# Altium PCB cree_module_v2.PcbDoc
Units mil, origin at the board's own origin, x right, y up, seen from the top; angles counter-clockwise.
Board outline 1500 x 1075 mil, 2 copper layers (Top Layer, Bottom Layer); 23 components, 17 nets, 67 pads, 9 vias.
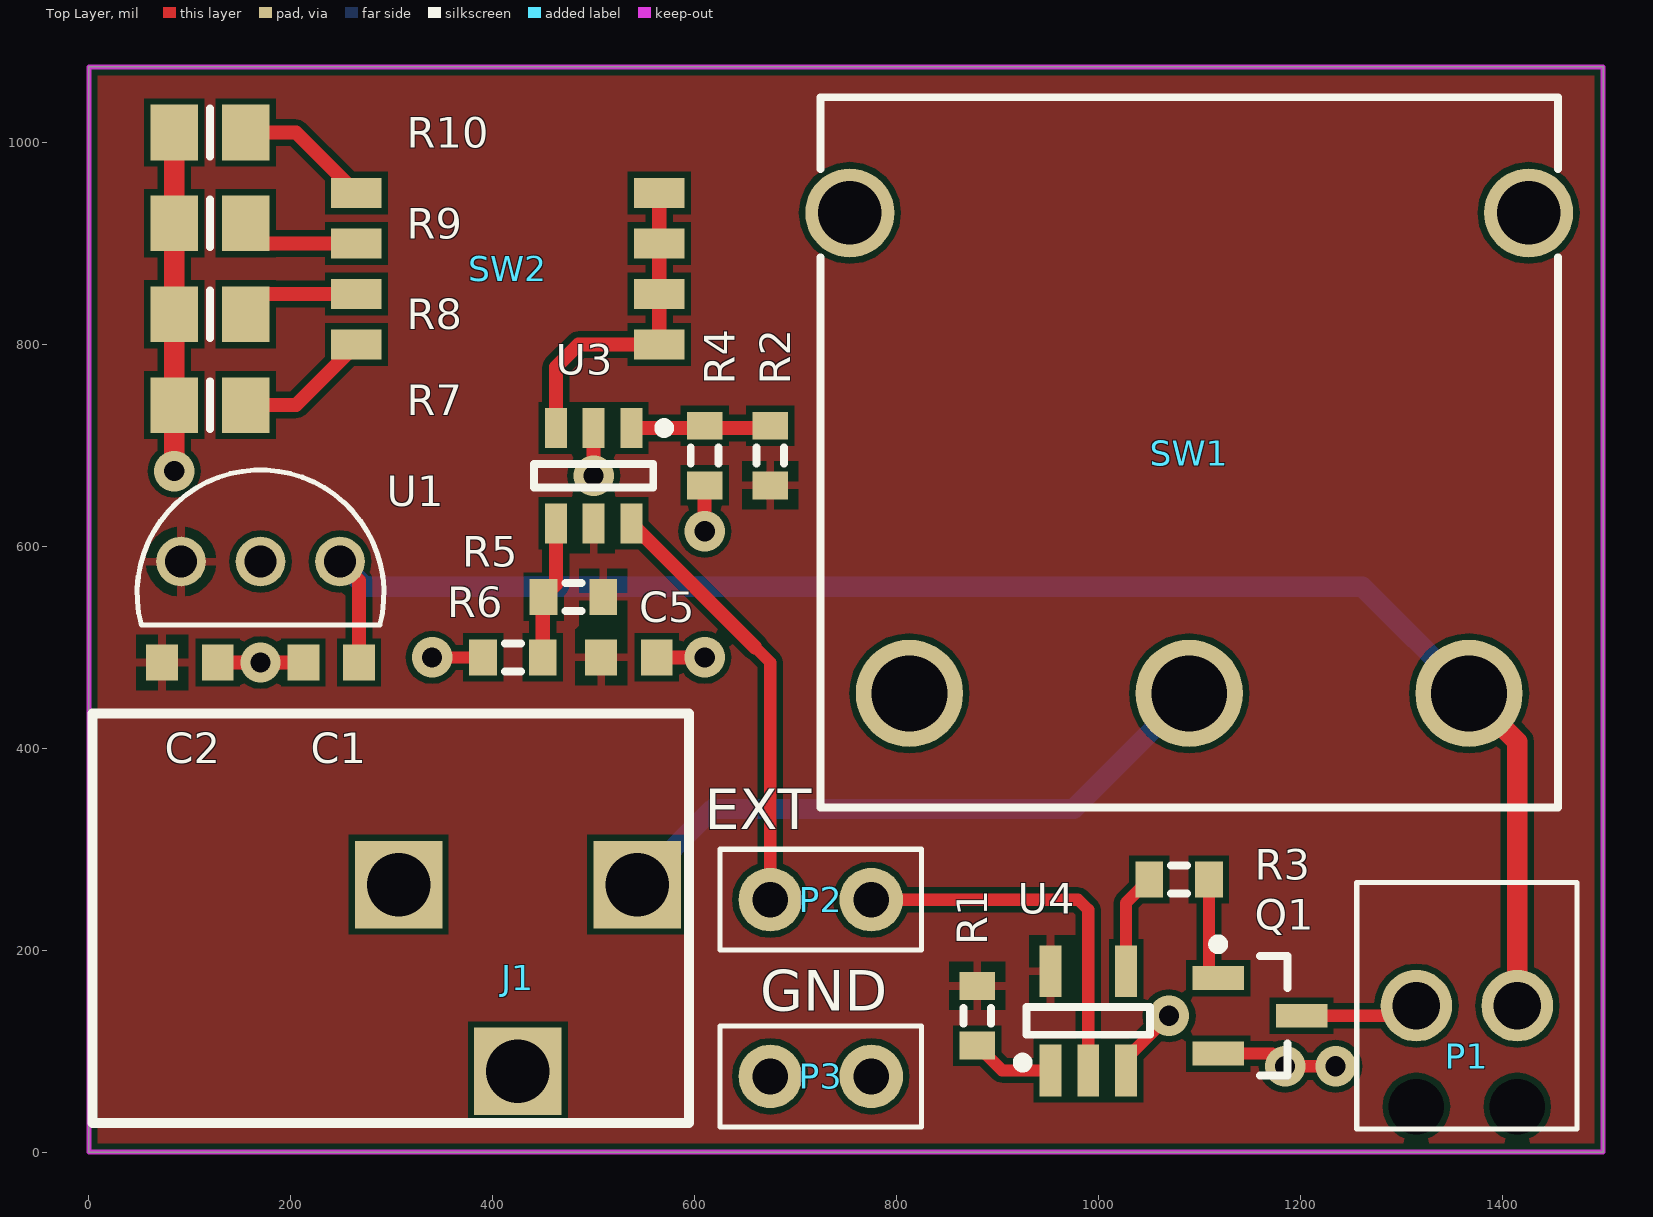
[diagram p0: Top Layer view]
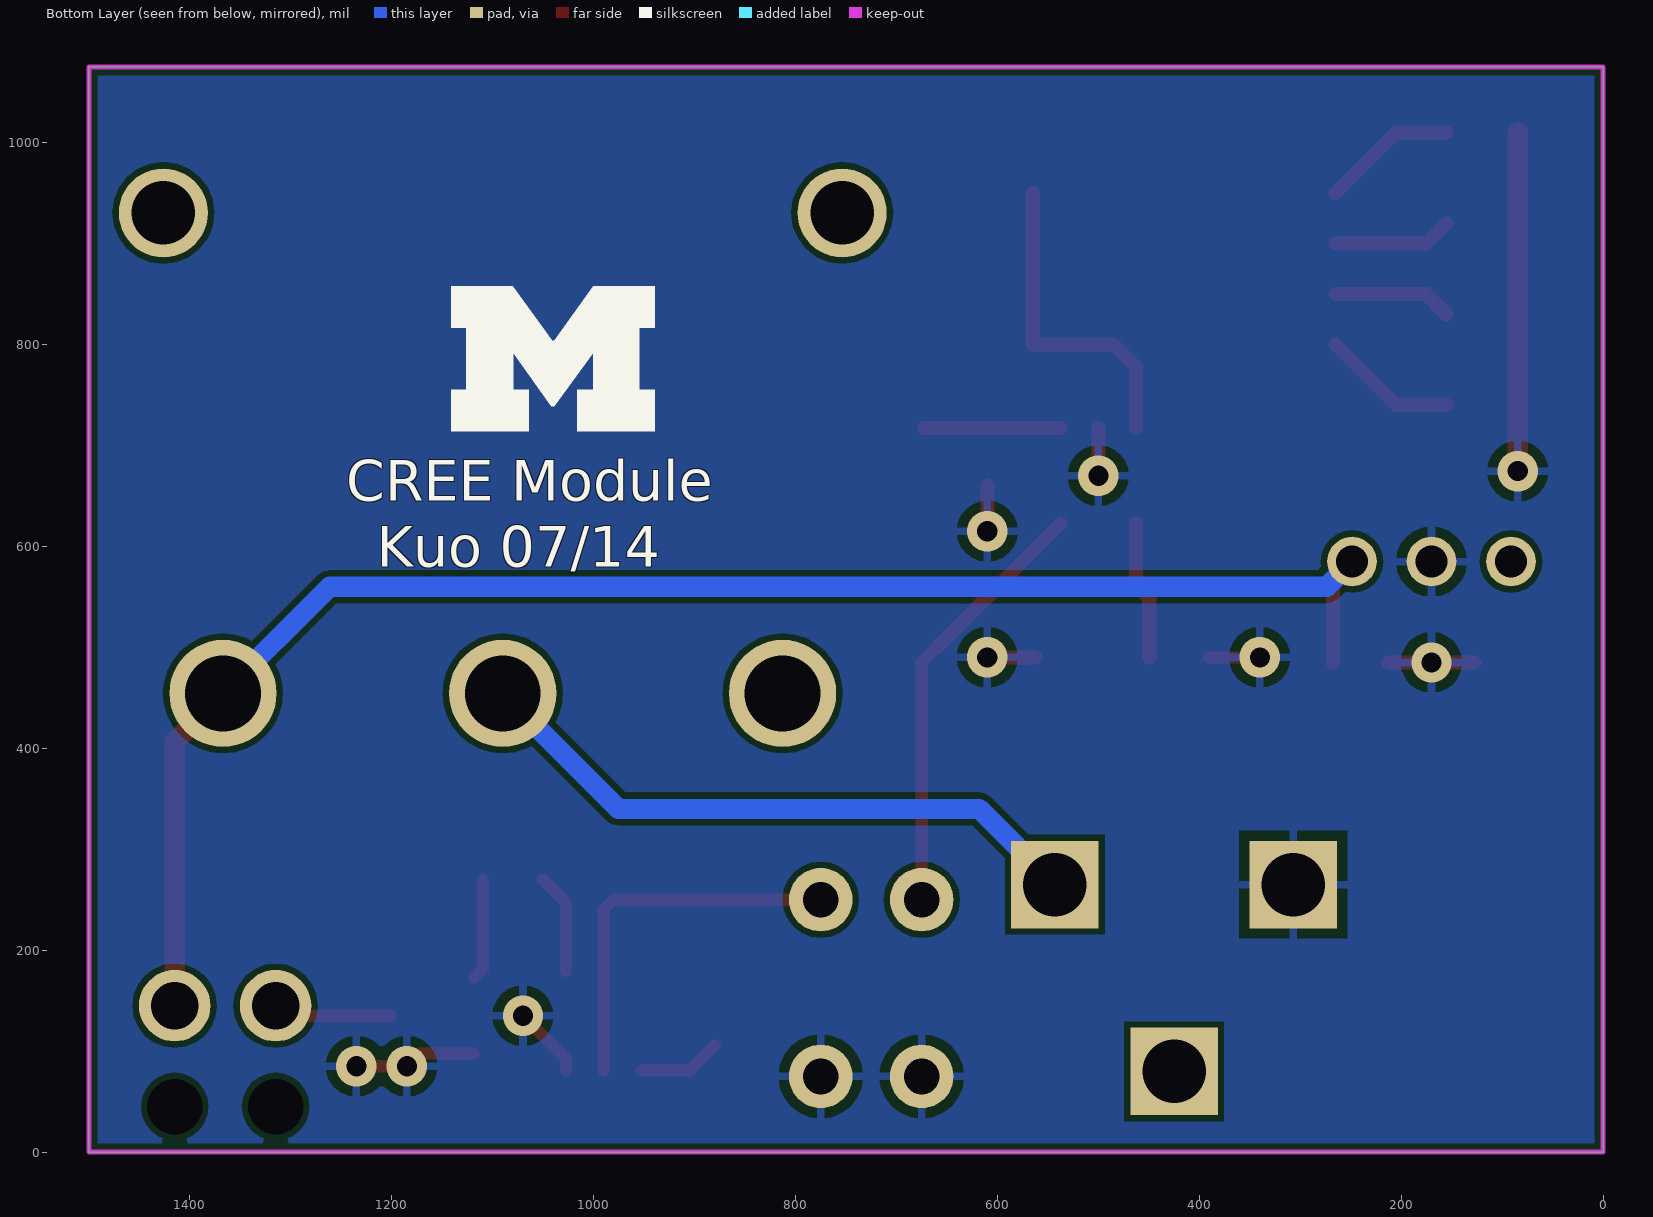
[diagram p1: Bottom Layer view, seen from below]

## Layer stack, top to bottom
Top Solder: solder mask 0.4, Solder Resist, Dk 3.5
Top Layer: signal copper 1.4
Dielectric 1: dielectric 12.6, FR-4, Dk 4.8
Bottom Layer: signal copper 1.4
Bottom Solder: solder mask 0.4, Solder Resist, Dk 3.5

## Board outline
0,0 1500,0 1500,1075 0,1075

## Design rules (kind name [scope] priority, off if disabled: settings)
Clearance "Clearance~Sunstone Circuits" [All] p1: gap=6 // Sunstone Circuits Minimum Clearance Rule (Double Sided)
HoleSize "HoleSize~Sunstone Circuits" [All] p1: absolutevalues=TRUE maxlimit=251 minlimit=16 maxpercent=80.000 minpercent=20.000 // SSC Hole Size Rule For Single Sided & Double Sided Designs.
HoleSize Testpoint [All] p2: absolutevalues=TRUE maxlimit=100 minlimit=1 maxpercent=80.000 minpercent=20.000
HoleSize TestPointUsage [All] p3: absolutevalues=TRUE maxlimit=100 minlimit=1 maxpercent=80.000 minpercent=20.000
MinimumAnnularRing "MinimumAnnularRing~Sunstone Circuits" [All] p1: minimumring=7 // Sunstone Circuits Minimum Annular Ring (Double Sided)
PlaneClearance "PlaneClearance~Sunstone Circuits" [All] p1: clearance=12 // Sunstone Circuits Power Plane Clearance Rule (Double Sided)
PlaneConnect "PlaneConnect~Sunstone Circuits" [All] p1: planeconnectstyle=Relief reliefexpansion=10 reliefentries=4 reliefconductorwidth=8 reliefairgap=10 // Sunstone Circuits Power Plane Connect Rule (Double Sided)
PolygonConnect "PolygonConnect~Sunstone Circuits" [All] p1: connectstyle=Relief reliefconductorwidth=8 reliefentries=4 polygonreliefangle="90 Angle" airgapwidth=10 // Sunstone Circuits Polygon Connect Style (Double Sided)
RoomDefinition cree_module [InComponentClass('cree_module')] p1: confinementstyle=ConfineIn formatcopy=TRUE lockcomponents=FALSE outline -13.65,13.78 -13.65,449.29 35.26,449.29 35.26,688.24 39.13,688.24 39.13,1059.37 200.87,1059.37 200.87,1058.86 1483.32,1058.86 1483.32,279.55 1486.56,279.55 1486.56,7.44 1243.44,7.44 1243.44,12.5 622.5,12.5 622.5,13.78
RoutingVias "RoutingVias~Sunstone Circuits" [All] p1: holewidth=16 width=30 viastyle="Through Hole" minholewidth=16 minwidth=30 maxholewidth=20 maxwidth=40 // Sunstone Circuits Routing Vias Rule (Double Sided)
ShortCircuit "ShortCircuit~Sunstone Circuits" [All] p1: allowed=FALSE // Sunstone Circuits Short Circuit Rule~Do Not Allow (Double Sided)
SolderMaskExpansion "Tent Vias" [isvia] p1: expansion=-15 // Sunstone Circuits Solder Mask Expansion Rule (Double Sided)
SolderMaskExpansion "SolderMaskExpansion~Sunstone Circuits" [All] p2: expansion=3 // Sunstone Circuits Solder Mask Expansion Rule (Double Sided)
ViasUnderSMD "ViasUnderSMD~Sunstone Circuits" [All] p1: allowed=FALSE // Sunstone Circuits Vias Under SMD~Do Not Allow (Double Sided)
Width "Width~Sunstone Circuits" [All] p1: maxlimit=100 minlimit=6 preferedwidth=10 // Sunstone Circuits Minimum Width Rule (Double Sided)
25 further rules are at their usual default settings.

## Components (designator, comment, footprint, x,y, rotation, side; value= is the part's Value field where it differs from the comment)
C1 "Cap Semi" 1608[0603] 240,485 r0 top
C2 "Cap Semi" 1608[0603] 100,485 r180 top
C5 "Cap Semi" 1608[0603] 535,490 r180 top
J1 "PJ-102AH" PJ-102AH 425,265 r90 top
P1 "Screw connector" MPT_2position 1365,145 r0 top
P2 "1 x 2 header" "1x2 header" 725,250 r0 top
P3 "1 x 2 header" "1x2 header" 725,75 r180 top
Q1 "Si2312CDS" SOT95P250-3N 1160,135 r0 top
R1 "Res3" J1-0603 880,135 r90 top
R2 "Res3" J1-0603 675,690 r270 top
R3 "Res3" J1-0603 1080,270 r180 top
R4 "Res3" J1-0603 610,690 r90 top
R5 "Res3" J1-0603 480,550 r0 top
R6 "Res3" J1-0603 420,490 r0 top
R7 "Res3" 6-0805_N 120,740 r0 top
R8 "Res3" 6-0805_N 120,830 r0 top
R9 "Res3" 6-0805_N 120,920 r0 top
R10 "Res3" 6-0805_N 120,1010 r0 top
SW1 "D502J12S2AHQF" "Rocker switch" 1090,415 r270 top
SW2 "CHS-04TB" CHS04TB 415,875 r90 top
U1 "LM78L05" TO92 170,585 r0 top
U3 "LTC6992" TSOT23-6 500,670 r270 top
U4 "SN74LVC1G126" SOT23-5 990,130 r90 top

## Footprints (in the part's own frame and the unit in brackets; to place one, negate y for a bottom-side part, rotate by r counter-clockwise, add the part's x,y. Pads: shape width x height; smd on the part's side, far side on the other; paste and mask are expansions set on the pad)
"1x2 header" [mm] "1x2 header, 100 mils"
  round 1.6 hole 0.9: 1(-1.27,0) 2(1.27,0)
  silkscreen extent -2.54,-1.27 2.54,1.27, body extent -2.53,-1.26 2.53,1.26, height 8.38
6-0805_N [mm] "Chip Resistor, Body 2.0x1.2mm, IPC Medium Density"
  rect 1.2x1.4 smd: 1(-0.9,0) 2(0.9,0)
  silkscreen extent 0,-0.6 0,0.6, body extent -1.07,-0.7 1.07,0.7, height 0.7
1608[0603] [mm] "Chip Capacitor, Body 1.6x0.8mm, IPC High Density"
  rect 0.8x0.9 smd: 1(-0.7,0) 2(0.7,0)
  body extent -0.87,-0.48 0.87,0.48, height 1.3
CHS04TB [mm] "4 POS DIP SWITCH"
  rect 0.76x1.27 smd: 1(-1.905,-3.81) 2(-1.905,3.81) 3(-0.635,-3.81) 4(-0.635,3.81) 5(0.635,-3.81) 6(0.635,3.81) 7(1.905,-3.81) 8(1.905,3.81)
J1-0603 [mm] "Chip Resistor, Body 1.6x0.8mm, IPC High Density"
  rect 0.7x0.9 smd: 1(-0.75,0) 2(0.75,0)
  silkscreen extent -0.2,-0.35 0.2,0.35, body extent -0.85,-0.48 0.85,0.48, height 0.9
MPT_2position [mm] "Screw connector 2 pos"
  round 1.8 hole 1.2: 1(-1.27,0) 2(1.27,0)
  round 0 hole 1.4: ""(-1.27,-2.54) ""(1.27,-2.54)
  silkscreen extent -2.77,-3.1 2.77,3.1
PJ-102AH [mm] "Power Jack"
  rect 2.2x2.2 hole 1.6: 1(0,-3) 2(0,3) 3(-4.7,0)
  silkscreen extent -6,-4.3 4.3,10.7, body extent -5.75,-3.99 4.08,10.89, height 10
"Rocker switch" [mm] "PCB through hole right angle"
  round 2.7 hole 1.91: 1(-1,0) 1A(-1,7.04) 1B(-1,-7.04)
  round 2.24 hole 1.6: ""(-13.09,8.54) ""(-13.09,-8.54)
  silkscreen extent -16,-9.28 1.88,9.28
SOT23-5 [mm] "SOT23, 5-Leads, Body 2.9x1.6mm, Pitch 0.95mm, Lead Span 2.8mm, IPC High Density"
  rect 1.3x0.55 smd: 1(-1.25,0.95) 2(-1.25,0) 3(-1.25,-0.95) 4(1.25,-0.95) 5(1.25,0.95)
  silkscreen extent -1.17,-1.55 0.35,1.77, body extent -0.67,-1.5 0.65,1.5, height 1.45
SOT95P250-3N [mm] "SOT23, 3-Leads, Body 2.9x1.3mm, Pitch 0.95mm, Lead Span 2.3mm, IPC Medium Density"
  rect 1.3x0.6 smd: 1(-1.05,0.95) 2(-1.05,-0.95) 3(1.05,0)
  silkscreen extent -1.17,-1.5 0.7,1.92, body extent -0.7,-1.5 0.7,1.5, height 1.2
TO92 [mm]
  round 1.25 hole 0.8: 1(-2,0) 2(0,0) 3(2,0)
  silkscreen extent -3.1,-1.6 3.1,2.3
TSOT23-6 [mm] "SOT23, 6-Leads, Body 3.0x2.9mm (max), Pitch 0.95mm, IPC Medium Density"
  rect 1x0.55 smd: 1(-1.2,0.95) 2(-1.2,0) 3(-1.2,-0.95) 4(1.2,-0.95) 5(1.2,0) 6(1.2,0.95)
  silkscreen extent -1.32,-1.5 0.3,1.9, body extent -0.87,-1.5 0.87,1.5, height 1

## Part data
C1 C2 C5: "Capacitor (Semiconductor SIM Model)"
J1: "CONN PWR JACK 2.1X5.5MM HIGH CUR"
P1: library part MPT_2POS, "Screw connector 2 positions"
P2 P3: "100 mils standard header"
Q1: "N-Channel 20 V (D-S) MOSFET"
R1 R2 R3 R4 R5 R6 R7 R8 R9 R10: "Resistor"
SW1: library part "rocker switch", "Miniature Snap-in Power Rocker Switches"
SW2: "SLIDE SWITCHES"
U1: "LM78LXX Series 3-Terminal Positive Regulators"
U3: "TimerBlox: Voltage-Controlled Pulse   Width Modulator (PWM)"
U4: "Single Bus Buffer Gate With 3-State Output"

## Via types
v1: diameter 40, hole 20, Top Layer to Bottom Layer, 9 vias

## Nets (pads, with @x,y where several pads share a name; then routed paths per layer and width w, separated by ;. In a path a pad name is that pad's centre, name@x,y a point inside that pad or via, vN(x,y) a via of type N, cw(c..) or ccw(c..) an arc to the next point about the centre after c; other vN are vias at no path point)
GND: C1.1 C2.1 C5.1 J1.2 P3.1 P3.2 Q1.2 R4.1 R6.1 R7.1 R8.1 R9.1 R10.1 U1.2 U3.2 U4.3 | length 804.5
  Top Layer w12: v1(340,490) R6.1 ; U4.3 1027.4,92.4 v1(1070,135) ; Q1.2 1167.6,97.6 1167.6,97.4 1172.6,97.4 v1(1185,85) v1(1235,85)
  Top Layer w14: C2.1 v1(170,485) C1.1 ; v1(500,670) U3.2 ; C5.1 v1(610,490) ; v1(610,615) R4.1
  Top Layer w20: v1(84.57,674.57) R7.1 R8.1 R9.1 R10.1
NetJ1_1: J1.1 SW1.1 | length 625.3
  Bottom Layer w20: J1.1 618.11,340 975.63,340 SW1.1
NetP1_1: P1.1 Q1.3 | length 117.8
  Top Layer w12: Q1.3 1305,135 P1.1
NetP2_1: P2.1 U3.6 | length 429.8
  Top Layer w12: 660,500.16 675,485.16 P2.1
  Top Layer w14: U3.6 660,500.16
NetP2_2: P2.2 U4.2 | length 378.4
  Top Layer w12: P2.2 980,250 990,240 U4.2
NetQ1_1: Q1.1 R3.1 | length 101.4
  Top Layer w12: R3.1 1109.53,181.54 Q1.1
NetR1_1: R1.1 U4.1 | length 82.8
  Top Layer w12: R1.1 904.68,80.79 U4.1
NetR2_1: R2.1 R4.2 U3.1 | length 135.3
  Top Layer w14: U3.1 R2.1@672.72,717.24
NetR3_2: R3.2 U4.4 | length 100.3
  Top Layer w12: U4.4 1027.4,246.93 R3.2
NetR5_1: R5.1 R6.2 U3.4 | length 138.2
  Top Layer w14: R6.2 449.53,549.06 R5.1 462.6,562.13 U3.4
NetR7_2: R7.2 SW2.2 | length 134.4
  Top Layer w14: R7.2 205,740 SW2.2
NetR8_2: R8.2 SW2.4 | length 117.9
  Top Layer w14: R8.2 175.43,850 SW2.4
NetR9_2: R9.2 SW2.6 | length 117.9
  Top Layer w14: R9.2 175.43,900 SW2.6
NetR10_2: R10.2 SW2.8 | length 134.4
  Top Layer w14: R10.2 205,1010 SW2.8
NetSW2_1: SW2.1 SW2.3 SW2.5 SW2.7 U3.3 | length 322
  Top Layer w14: U3.3 462.6,777.6 485,800 SW2.1 SW2.3 SW2.5 SW2.7
VCC5: C2.2 C5.2 R1.2 R2.2 R5.2 U1.1 U3.5 U4.5
VIN: C1.2 P1.2 SW1.1A U1.3 | length 1609.5
  Top Layer w14: U1.3 267.56,566.18 C1.2
  Top Layer w20: SW1.1A 1415,406.54 P1.2
  Bottom Layer w20: U1.3 273.74,560 1261.54,560 SW1.1A
pads on no net: J1.3 P1. SW1. SW1.1B

## Polygon pours and split planes (outlines as drawn)
GND on Bottom Layer "Bottom Layer-No Net" (solid, pour order 4): 0,0 1500,0 1500,1075 0,1075
VCC5 on Top Layer "Bottom Layer-No Net" (solid, pour order 2): 0,0 1500,0 1500,1075 0,1075

## Keep-outs
Keep-Out Layer:
  the board outline again, w5

## Silkscreen, mask and mechanical layers (free items; w line width, h text height)
Top Overlay:
  text "EXT" at 610,320 h40
  text "GND" at 665,140 h40
Bottom Overlay:
  region: 1140.96,714.04 1064.23,714.04 1064.23,755 1079.84,755 1079.84,792.06 1041.8,738.74 1039.2,738.74 1000.51,792.06 1000.51,755 1016.12,755 1016.12,714.04 939.4,714.04 939.4,755 955,755 955,816.77 939.4,816.77 939.4,857.73 1000.19,857.73 1039.2,803.76 1041.15,803.76 1080.16,857.73 1140.96,857.73 1140.96,816.77 1126,816.77 1126,755 1140.96,755
  text "CREE Module" at 1245,645 h40
  text "Kuo 07/14" at 1215,580 h40